# Altium PCB golgi_bot.PcbDoc
Units mm, origin at the board's own origin, x right, y up, seen from the top; angles counter-clockwise.
Board outline 67.56 x 95 mm, 2 copper layers (Top Layer, Bottom Layer); 22 components, 25 nets, 102 pads, 6 vias.
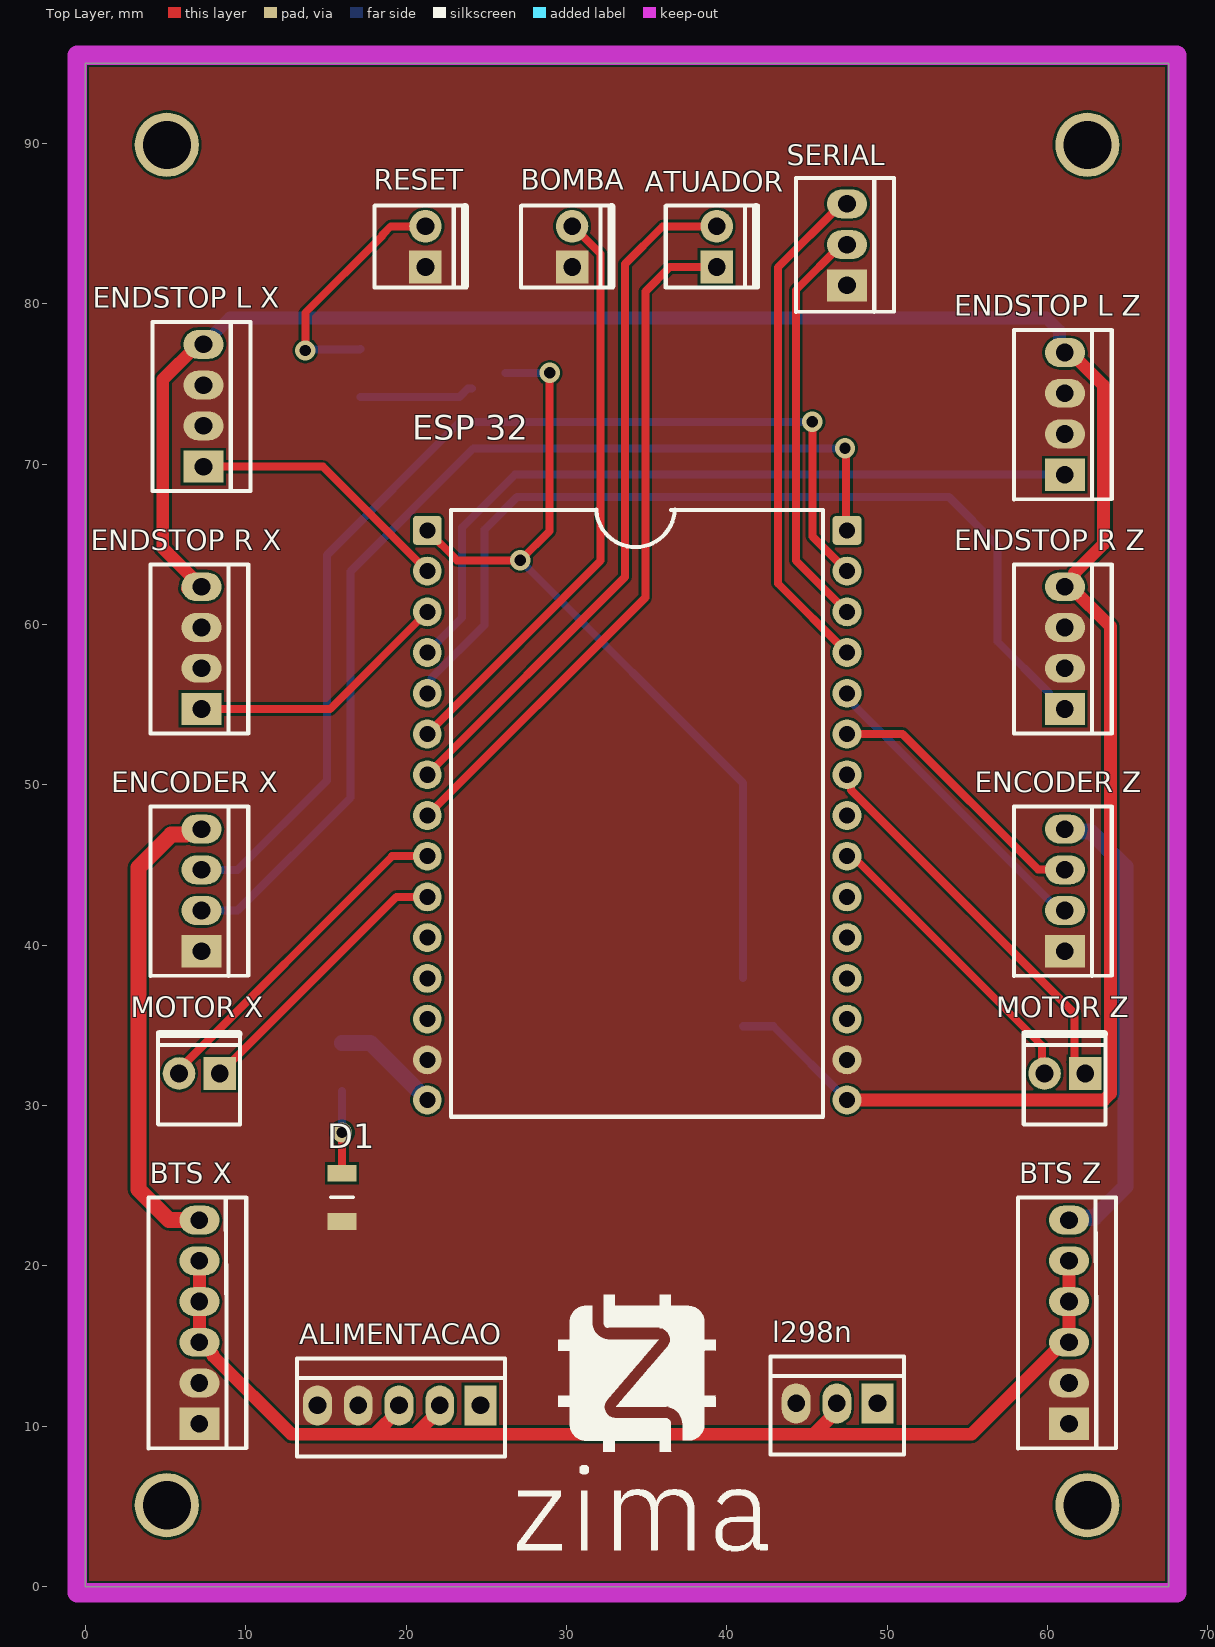
[diagram p0: Top Layer view]
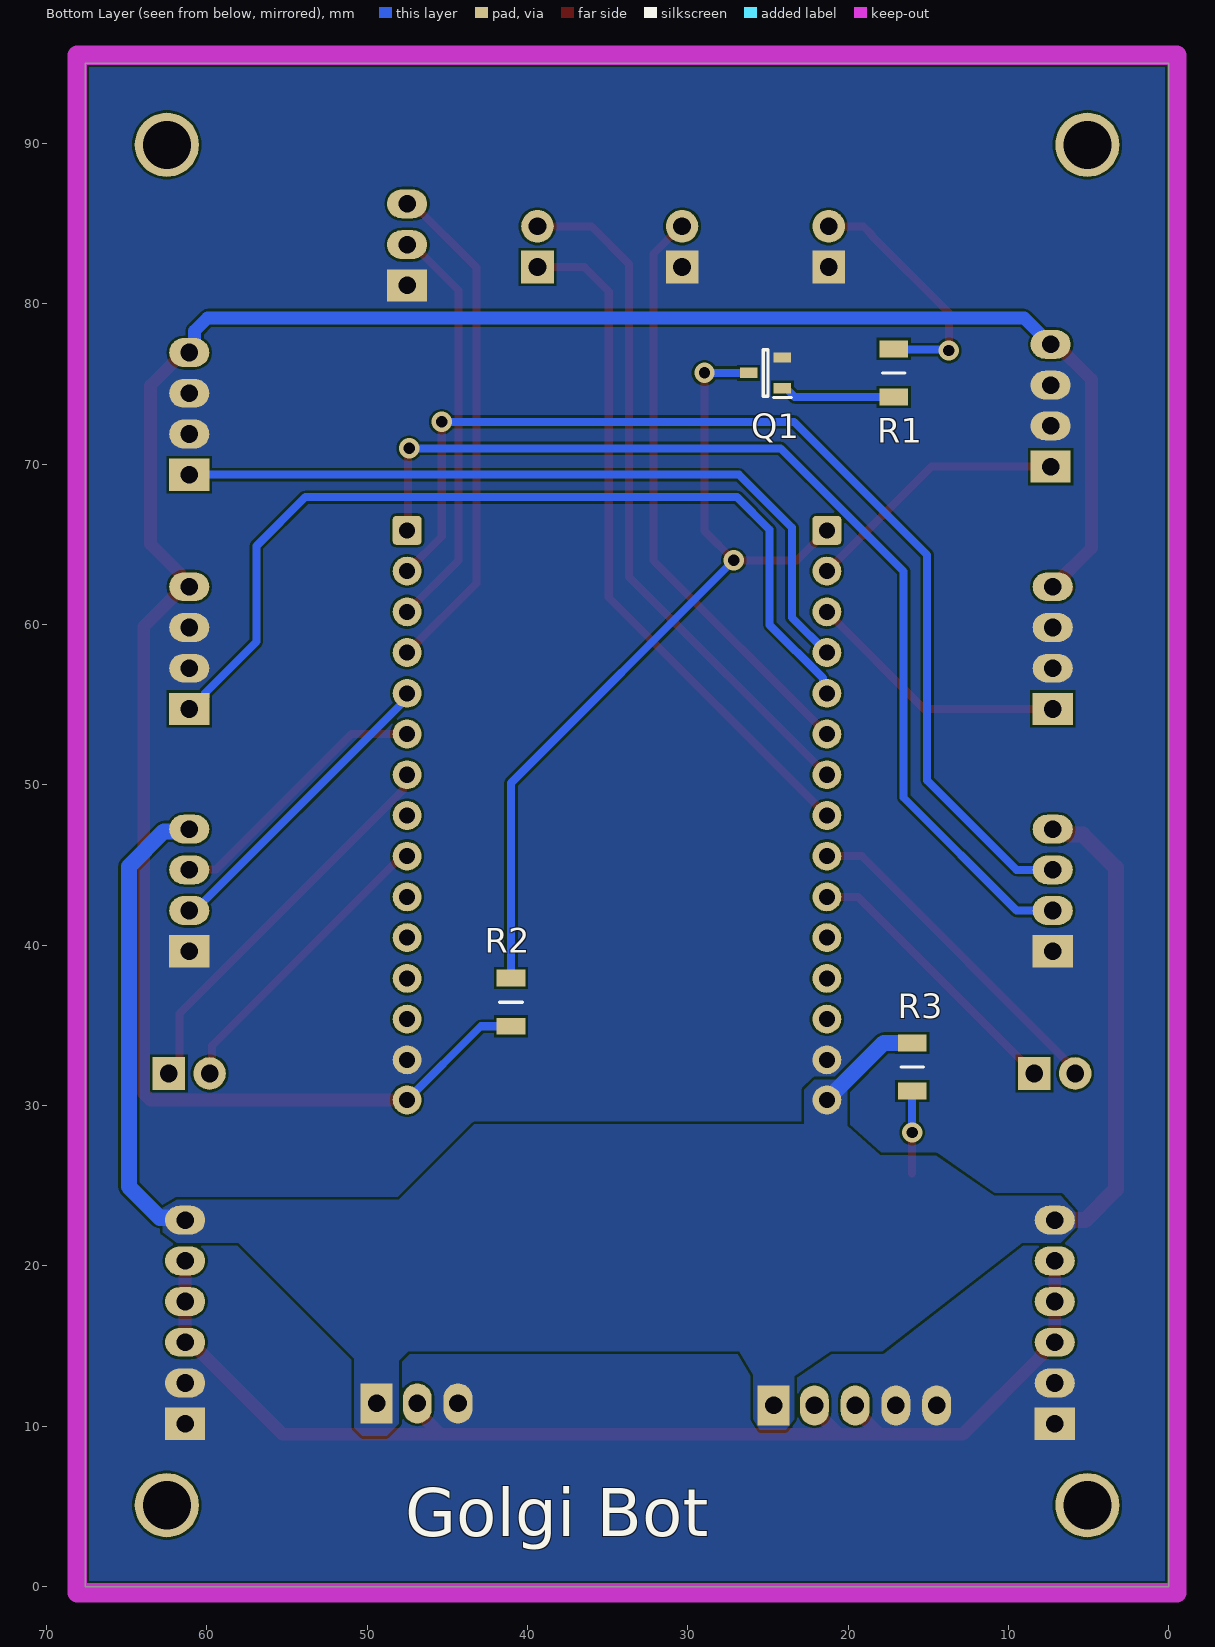
[diagram p1: Bottom Layer view, seen from below]

## Layer stack, top to bottom
Top Solder: solder mask 0.0102, Solder Resist, Dk 3.5
Top Layer: signal copper 0.0356
Dielectric 1: dielectric 0.32, FR-4, Dk 4.8
Bottom Layer: signal copper 0.0356
Bottom Solder: solder mask 0.0102, Solder Resist, Dk 3.5

## Board outline
0,0 67.564,0 67.564,94.996 0,94.996

## Design rules (kind name [scope] priority, off if disabled: settings)
Clearance [All] p1: gap=0.152 ignorepadtopadclearanceinfootprint=FALSE except(0: Arc-Hole Track-Hole SMDPad-Hole THPad-Hole Via-Hole Fill-Hole Poly-Hole Region-Hole Text-Hole)
ComponentClearance [All] p1: gap=0.1 collisioncheckmode=3 verticalgap=0.1 showdistances=FALSE
HoleSize [All] p1: absolutevalues=TRUE maxlimit=3.048 minlimit=0.025 maxpercent=80.000 minpercent=20.000
MinimumSolderMaskSliver [All] p1: minsoldermaskwidth=0.1
PolygonConnect [All] p1: connectstyle=Direct reliefconductorwidth=0.254 reliefentries=4 polygonreliefangle="90 Angle" airgapwidth=0.254
RoutingVias [All] p1: holewidth=0.4 width=0.8 viastyle="Through Hole" minholewidth=0.3 minwidth=0.6 maxholewidth=0.5 maxwidth=1
SilkToSilkClearance [All] p1: silktosilkclearance=0
SilkToSolderMaskClearance [IsPad] p1: minsilkscreentomaskgap=0 clearancetoexposedcopper=TRUE
SolderMaskExpansion [All] p1: expansion=0.08 istentingtop=FALSE
Width [All] p1: maxlimit=2.032 minlimit=0.3 preferedwidth=0.5 minimp=50.000000 maximp=50.000000 favimp=50.000000
25 further rules are at their usual default settings.

## Components (designator, comment, footprint, x,y, rotation, side; value= is the part's Value field where it differs from the comment)
ALIMENTACAO "KK_2.54_5vias" KK_5vias_180° 24.638,11.303 r180 top
ATUADOR "KK_2.54_2vias" KK_2VIAS_180º 39.37,82.296 r90 top
BOMBA "KK_2.54_2vias" KK_2VIAS_180º 30.353,82.296 r90 top
"BTS X" "KK_2.54_6vias" KK_6vias_180° 7.112,10.16 r90 top
"BTS Z" "KK_2.54_6vias" KK_6vias_180° 61.341,10.16 r90 top
D1 "LED 3MM RED" "LED RED" 16.002,24.281 r270 top
"ENCODER X" "KK_2.54_4vias" KK_4vias_180° 7.239,39.624 r90 top
"ENCODER Z" "KK_2.54_4vias" KK_4vias_180° 61.087,39.624 r90 top
"ENDSTOP L X" "KK_2.54_4vias" KK_4vias_180° 7.366,69.85 r90 top
"ENDSTOP L Z" "KK_2.54_4vias" KK_4vias_180° 61.087,69.342 r90 top
"ENDSTOP R X" "KK_2.54_4vias" KK_4vias_180° 7.239,54.737 r90 top
"ENDSTOP R Z" "KK_2.54_4vias" KK_4vias_180° 61.087,54.737 r90 top
"ESP 32" "microcontrolador" ESP32_Desvikit_v1 21.323,65.873 r0 top value="ESP32 Desvikit V1"
l298n "KK_2.54_3vias" KK_3vias_180º 49.403,11.43 r180 top
"MOTOR X" "KK_2.54_2vias" KK_2VIAS_180º 8.382,32.004 r180 top
"MOTOR Z" "KK_2.54_2vias" KK_2VIAS_180º 62.357,32.004 r180 top
Q1 "Trans BC817" SOT96P240X110-3N 25.146,75.692 r0 bottom
R1 "2k2" RESC3216X60N 17.152,75.692 r90 bottom
R2 "2k2" RESC3216X60N 41.021,36.449 r270 bottom
R3 "680R" RESC3216X60N 16.002,32.409 r270 bottom
RESET "KK_2.54_2vias" KK_2VIAS_180º 21.209,82.296 r90 top
SERIAL "KK_2.54_3vias" KK_3vias_180º 47.498,81.153 r90 top

## Footprints (in the part's own frame and the unit in brackets; to place one, negate y for a bottom-side part, rotate by r counter-clockwise, add the part's x,y. Pads: shape width x height; smd on the part's side, far side on the other; paste and mask are expansions set on the pad)
ESP32_Desvikit_v1 [mm]
  rrect25% 1.8x1.8 hole 1: 1(0,0) 30(26.175,0)
  round 1.8 hole 1: 2(0,-2.54) 3(0,-5.08) 4(0,-7.62) 5(0,-10.16) 6(0,-12.7) 7(0,-15.24) 8(0,-17.78) 9(0,-20.32) 10(0,-22.86) 11(0,-25.4) 12(0,-27.94) 13(0,-30.48) 14(0,-33.02) 15(0,-35.52) 16(26.175,-35.52) 17(26.175,-33.02) 18(26.175,-30.48) 19(26.175,-27.94) 20(26.175,-25.4) 21(26.175,-22.86) 22(26.175,-20.32) 23(26.175,-17.78) 24(26.175,-15.24) 25(26.175,-12.7) 26(26.175,-10.16) 27(26.175,-7.62) 28(26.175,-5.08) 29(26.175,-2.54)
  silkscreen extent 1.47,-36.57 24.69,1.31, body extent -1.2,-46.03 27.4,4.9, height 15.1
KK_2VIAS_180º [mil]
  rect 80x80 hole 43.31: 1(0,0)
  round 80 hole 43.31: 2(100,0)
  silkscreen extent -50,-101 151,125, body extent -61,-108 165,128, height 468
KK_3vias_180º [mm]
  rect 2x2.5 hole 1.1: 1(0,0)
  oval 1.8x2.5 hole 1.1: 2(2.54,0) 3(5.08,0)
  silkscreen extent -1.65,-2.92 6.69,3.18, body extent -1.6,-2.95 6.69,3.05, height 11.9
KK_4vias_180° [mm]
  rect 2x2.5 hole 1.1: 1(0,0)
  oval 1.8x2.5 hole 1.1: 2(2.54,0) 3(5.08,0) 4(7.62,0)
  silkscreen extent -1.53,-2.92 9.02,3.18, body extent -1.4,-2.79 8.76,3.01, height 11.72
KK_5vias_180° [mm]
  rect 2x2.5 hole 1.1: 1(0,0)
  oval 1.8x2.5 hole 1.1: 2(2.54,0) 3(5.08,0) 4(7.62,0) 5(10.16,0)
  silkscreen extent -1.53,-2.92 11.43,3.18, body extent -1.4,-2.79 11.3,3.01, height 11.72
KK_6vias_180° [mm]
  rect 2x2.5 hole 1.1: 1(0,0)
  oval 1.8x2.5 hole 1.1: 2(2.54,0) 3(5.08,0) 4(7.62,0) 5(10.16,0) 6(12.7,0)
  silkscreen extent -1.53,-2.92 14.11,3.18, body extent -1.4,-2.79 13.84,3.05, height 11.7
"LED RED" [mm]
  rect 1.05x1.8 smd: 1(-1.5,0) 2(1.5,0)
  silkscreen extent 0,-0.7 0,0.7, body extent -0.79,-0.43 0.81,0.37, height 0.75
RESC3216X60N [mm]
  rect 1.05x1.8 smd: 1(-1.5,0) 2(1.5,0)
  silkscreen extent 0,-0.7 0,0.7, body extent -1.57,-0.8 1.58,0.8, height 0.6
SOT96P240X110-3N [mm]
  rect 1.1x0.65 smd: 1(-1.05,0.96) 2(-1.05,-0.96) 3(1.05,0)
  silkscreen extent -1.6,-1.45 0.15,1.54, body extent -1.2,-1.45 1.2,1.45, height 1.1

## Part data
ALIMENTACAO: "Conector KK 2.54mm 5 vias", Descrição="Conector KK 3 vias com passo 2.54mm", Encapsulamento="PTH - 180º", Modelo="3 vias - 180º", Valor="KK 5 vias 180º"
ATUADOR BOMBA "MOTOR X" "MOTOR Z" RESET: "Conector KK 2.54mm 2 vias", Descrição="Conector KK 3 vias com passo 2.54mm", Encapsulamento="PTH - 180º", Modelo="2 vias - 180º", Valor="KK 2 vias 180º"
"BTS X" "BTS Z": "Conector KK 2.54mm 6 vias", Descrição="Conector KK 3 vias com passo 2.54mm", Encapsulamento="PTH - 180º", Modelo="3 vias - 180º", Valor="KK 6 vias 180º"
D1: Current If Luminous Intensity=2, Forward Current If=20, Forward Voltage VF Max=2.5, LED Colour=Red, Manufacturer=Paralight, Manufacturer Part Number=IMP585, Operating Temperature Max=85, Operating Temperature Min=-40, Operating Temperature Range="-40°C to +85", Peak Forward Current=7, Supplier Part Number 1="Led 3mm Vermelho Difuso L-314HD - Paralight", Voltage Vf Typ="2.2V<!--FANDB--><div class=\"features-and-benefits-container\"><div class=\"features-and-benefits-description\"><span class=\"features-benefits-value\">The L-934LID from Kingbright is a through hole round shape high efficiency red colour LED. The device is made of gallium arsenide phosphide on gallium phosphide orange light emitting diode. This LED is widely used because of low power consumption, long life and solid state reliability.</span></div><div class=\"features-and-benefits-list\"><ul class=\"features-and-benefits-list-list\"><li class=\"features-and-benefits-list-item\">Standard bulb size of T-1 (3mm)</li><li class=\"features-and-benefits-list-item\">Reliable and rugged</li><li class=\"features-and-benefits-list-item\">Viewing angle is 60°</li><li class=\"features-and-benefits-list-item\">Luminous intensity of 3mcd at 2mA</li><li class=\"features-and-benefits-list-item\">Forward voltage is 2.0V</li><li class=\"features-and-benefits-list-item\">Forward current (If) is 20mA</li><li class=\"features-and-benefits-list-item\">Dominant wavelength is 625nm at IF=20mA</li><li class=\"features-and-benefits-list-item\">Peak wavelength is 627nm at IF=20", Bulb Size=3mm, ComponentLink1Description=http://loja.multcomercial.com.br/led-3mm-vermelho-difuso-l-314hd-paralight.html, ComponentLink1URL=http://loja.multcomercial.com.br/led-3mm-vermelho-difuso-l-314hd-paralight.html, Dominant Wavelength=625, External Diameter=2.9, External Length / Height=4.6, Forward Current If Max=20, Forward Voltage=2, Lead Cross-section Depth=0.5, Lead Cross-section Width=0.5, Lead Spacing=2.54, LED / Lamp Size="3mm / T-1", LED Mounting="Through Hole", LED Type=Standard, Lens Shape=Round, Luminous Intensity=3, Luminous Intensity @ If Min=0.7, Luminous Intensity Typ=3, Mounting Type="PCB Through Hole", MSL=-, No. of Pins=2, Packaging=Each, Peak Wavelength=625, PIV Max=5, Pricing 1="1=0.15 (BRL)", RoHS=YES, Stock 1=35260, Supplier 1="Mult Comercial", SVHC="No SVHC (15-Jun-2015)", Viewing Angle=60°, Wavelength Typ=625
"ENCODER X" "ENCODER Z" "ENDSTOP L X" "ENDSTOP L Z" "ENDSTOP R X" "ENDSTOP R Z": "Conector KK 2.54mm 4 vias", Descrição="Conector KK 3 vias com passo 2.54mm", Encapsulamento="PTH - 180º", Modelo="3 vias - 180º", Valor="KK 4 vias 180º"
"ESP 32": library part "ESP32 Desvikit v1", "microcontrolador com moculo bluethoth e wifi"
l298n SERIAL: "Conector KK 2.54mm 3 vias", Descrição="Conector KK 3 vias com passo 2.54mm", Encapsulamento="PTH - 180º", Modelo="3 vias - 180º", Valor="KK 3 vias 180º"
Q1: "Transistor BJT NPN BC817-25-7-F", Arrow Part Number=BC817-25-7-F, Manufacturer_Name="Diodes Inc.", Mouser Part Number=621-BC817-25-7-F, Arrow Price/Stock=https://www.arrow.com/en/products/bc817-25-7-f/diodes-incorporated, Datasheet Link=https://www.diodes.com/assets/Datasheets/ds11107.pdf, Height=1.1mm, Manufacturer_Part_Number=BC817-25-7-F, Mouser Price/Stock=https://www.mouser.co.uk/ProductDetail/Diodes-Incorporated/BC817-25-7-F?qs=rGAXPo9uwV0jK0EyLZnqOw%3D%3D
R1 R2 R3: library part "Resistor 1206", "Resistor", Arrow Part Number=CRCW12064K70FKEA, Manufacturer_Name=Vishay, Mouser Part Number=71-CRCW1206-4.7K-E3, Arrow Price/Stock=https://www.arrow.com/en/products/crcw12064k70fkea/vishay, Datasheet Link=http://docs-emea.rs-online.com/webdocs/13ec/0900766b813ecc08.pdf, Height=0.6mm, Manufacturer_Part_Number=CRCW12064K70FKEA, Mouser Price/Stock=https://www.mouser.co.uk/ProductDetail/Vishay-Dale/CRCW12064K70FKEA?qs=1vm4qhDHCvlKJmatsKzyFQ%3D%3D

## Free pads (board coordinates)
  round 4 hole 3: 1(5.08,5.08) 2(62.484,5.08) 3(62.484,89.916) 4(5.08,89.916)

## Via types
v1: diameter 1.27, hole 0.711, Top Layer to Bottom Layer, 6 vias

## Nets (pads, with @x,y where several pads share a name; then routed paths per layer and width w, separated by ;. In a path a pad name is that pad's centre, name@x,y a point inside that pad or via, vN(x,y) a via of type N, cw(c..) or ccw(c..) an arc to the next point about the centre after c; other vN are vias at no path point)
+3V3: "ENDSTOP L X.4" "ENDSTOP L Z.4" "ENDSTOP R X.4" "ENDSTOP R Z.4" "ESP 32.16" R2.2 | length 149
  Top Layer w0.8: 6.35,62.242 7.124,62.242 7.239,62.357 4.826,64.77 4.826,75.28 7.016,77.47 7.366,77.47 ; 47.498,30.353 63.519,30.353 63.925,30.759 63.925,59.869 61.437,62.357 61.087,62.357 61.686,62.956 61.686,63.214 63.5,65.029 63.5,74.899 61.437,76.962 61.087,76.962
  Bottom Layer w0.5: R2.2 42.902,34.949 47.498,30.353
  Bottom Layer w0.8: 7.366,77.47 9.017,79.121 59.944,79.121 60.753,78.312 60.753,77.296 61.087,76.962
+5: "BTS X.3" "BTS X.4" "BTS X.5" "BTS Z.3" "BTS Z.4" "BTS Z.5" ALIMENTACAO.2 ALIMENTACAO.3 l298n.2 | length 75.5
  Top Layer w0.8: 7.112,20.32 7.112,17.78 7.112,15.24 7.191,15.24 ; 7.962,14.469 7.962,14.39 12.851,9.501 18.04,9.501 ; ALIMENTACAO.3 19.558,11.019 18.04,9.501 ; ALIMENTACAO.2 22.098,11.019 20.58,9.501 ; l298n.2@47.235,11.312 45.425,9.501 ; 61.341,20.32 61.341,17.78 61.341,15.24 60.991,15.24 55.252,9.501 45.425,9.501 ; 18.04,9.501 20.58,9.501 ; 20.58,9.501 45.425,9.501
+12: "BTS X.6" "BTS Z.6" "ENCODER X.4" "ENCODER Z.4" "ESP 32.15" ALIMENTACAO.1 l298n.1 R3.1 | length 65.5
  Top Layer w1: 7.112,22.86 5.224,22.86 3.302,24.782 3.302,44.845 5.351,46.894 6.268,46.894 6.618,47.244 7.239,47.244
  Bottom Layer w1: R3.1 17.767,33.909 21.323,30.353 ; 61.087,47.244 61.233,47.098 62.661,47.098 64.852,44.906 64.852,24.944 62.915,23.006 61.487,23.006 61.341,22.86
atuador_l: "ESP 32.8" ATUADOR.1 | length 43.4
  Top Layer w0.5: 21.323,48.093 34.925,61.695 34.925,80.772 36.449,82.296 ATUADOR.1
atuador_r: "ESP 32.7" ATUADOR.2 | length 43.7
  Top Layer w0.5: 21.323,50.633 33.655,62.965 33.655,82.489 36.002,84.836 ATUADOR.2
bomba: "ESP 32.6" BOMBA.2 | length 36.9
  Top Layer w0.5: 21.323,53.173 32.131,63.981 32.131,83.119 30.414,84.836 BOMBA.2
en: "ESP 32.1" Q1.3 R2.1 | length 53.6
  Top Layer w0.5: 21.323,65.873 23.188,64.008 v1(27.125,64.008) 28.956,65.839 v1(28.956,75.692)
  Bottom Layer w0.5: Q1.3 v1(28.956,75.692) ; v1(27.125,64.008) 41.021,50.112 R2.1
encoder_a_x: "ENCODER X.3" "ESP 32.29" | length 68.1
  Top Layer w0.5: v1(45.339,72.644) 45.339,65.492 47.498,63.333
  Bottom Layer w0.5: 7.239,44.704 7.589,44.704 9.494,44.704 15.066,50.276 15.066,64.342 23.368,72.644 v1(45.339,72.644)
encoder_a_z: "ENCODER Z.3" "ESP 32.25" | length 17.1
  Top Layer w0.5: 47.498,53.173 50.967,53.173 59.42,44.72 61.071,44.72 61.087,44.704
encoder_b_x: "ENCODER X.2" "ESP 32.30" | length 65.5
  Top Layer w0.5: v1(47.371,70.993) 47.434,70.929 47.434,65.937 47.498,65.873
  Bottom Layer w0.5: 7.239,42.164 7.589,42.164 9.494,42.164 16.53,49.2 16.53,63.317 24.206,70.993 v1(47.371,70.993)
encoder_b_z: "ENCODER Z.2" "ESP 32.26" | length 20.1
  Top Layer w0.5: 47.498,55.713 47.66,55.713 ; 60.574,42.164 61.087,42.164
  Bottom Layer w0.5: 47.498,55.713 47.498,55.403 60.737,42.164 61.087,42.164
endstop_l_x: "ENDSTOP L X.1" "ESP 32.2" | length 16.7
  Top Layer w0.5: 7.366,69.85 14.806,69.85 21.323,63.333
endstop_l_z: "ENDSTOP L Z.1" "ESP 32.4" | length 47.6
  Bottom Layer w0.5: 21.323,58.253 23.495,60.425 23.495,66.04 26.797,69.342 61.087,69.342
endstop_r_x: "ENDSTOP R X.1" "ESP 32.3" | length 16.6
  Top Layer w0.5: 7.239,54.737 15.267,54.737 21.323,60.793
endstop_r_z: "ENDSTOP R Z.1" "ESP 32.5" | length 57.8
  Bottom Layer w0.5: 21.323,55.713 21.572,55.962 21.572,56.66 24.892,59.981 24.892,65.913 26.924,67.945 53.848,67.945 56.896,64.897 56.896,58.928 60.087,55.737 60.087,55.487 60.837,54.737 61.087,54.737
GND: "BTS X.1" "BTS X.2" "BTS Z.1" "BTS Z.2" "ENCODER X.1" "ENCODER Z.1" "ENDSTOP L X.2" "ENDSTOP L X.3" "ENDSTOP L Z.2" "ENDSTOP L Z.3" "ENDSTOP R X.2" "ENDSTOP R X.3" "ENDSTOP R Z.2" "ENDSTOP R Z.3" "ESP 32.14" "ESP 32.17" ALIMENTACAO.4 ALIMENTACAO.5 BOMBA.1 D1.2 l298n.3 Q1.2 RESET.1 SERIAL.1
motor_l_x: "ESP 32.10" "MOTOR X.1" | length 17.5
  Top Layer w0.5: 8.382,32.004 19.391,43.013 21.323,43.013
motor_l_z: "ESP 32.24" "MOTOR Z.1" | length 24.9
  Top Layer w0.5: 47.498,50.633 47.747,50.384 47.747,49.686 61.691,35.741 61.691,32.67 62.357,32.004
  Top Layer w0.7: 61.691,32.67 61.691,32.769
motor_r_x: "ESP 32.9" "MOTOR X.2" | length 21.2
  Top Layer w0.5: 5.842,32.004 5.842,32.258 19.137,45.553 21.323,45.553
motor_r_z: "ESP 32.22" "MOTOR Z.2" | length 18.9
  Top Layer w0.5: 47.498,45.553 47.85,45.553 59.669,33.734 59.669,32.152 59.817,32.004
NetD1_1: D1.1 R3.2 | length 5.1
  Top Layer w0.5: D1.1 v1(16.002,28.321)
  Bottom Layer w0.5: v1(16.002,28.321) R3.2
NetQ1_1: Q1.1 R1.1 | length 7.2
  Bottom Layer w0.5: R1.1 23.331,74.192 23.871,74.732 Q1.1
NetR1_2: R1.2 RESET.2 | length 15.6
  Top Layer w0.5: v1(13.716,77.089) 13.716,79.441 18.542,84.267 18.542,84.328 19.05,84.836 RESET.2
  Bottom Layer w0.5: v1(13.716,77.089) 13.767,77.14 17.1,77.14 R1.2
RX: "ESP 32.27" SERIAL.3 | length 31.8
  Top Layer w0.5: 47.498,58.253 43.18,62.571 43.18,82.265 47.148,86.233 SERIAL.3
TX: "ESP 32.28" SERIAL.2 | length 25.8
  Top Layer w0.5: 47.498,60.793 44.302,63.989 44.302,80.847 47.148,83.693 SERIAL.2
pads on no net: "ESP 32.11" "ESP 32.12" "ESP 32.13" "ESP 32.18" "ESP 32.19" "ESP 32.20" "ESP 32.21" "ESP 32.23"

## Polygon pours and split planes (outlines as drawn)
GND on Top Layer "GND_L01_P012" (solid, pour order 12): 0,94.996 67.564,94.996 67.564,0 0,0
+12 on Bottom Layer "+12_L02_P007" (solid, pour order 7): 9.144,21.463 6.731,21.463 5.842,22.352 5.842,23.368 6.731,24.384 10.891,24.384 14.498,26.888 18.034,26.924 20.066,28.744 20.066,30.988 20.701,31.623 22.098,31.623 22.733,30.988 22.733,28.829 43.307,28.829 48.006,24.13 61.849,24.13 62.738,23.622 62.738,22.098 61.849,21.463 58.039,21.463 50.8,14.224 50.8,9.906 50.292,9.398 48.768,9.398 48.006,10.16 48.006,14.087 47.413,14.679 26.797,14.679 25.908,13.208 25.908,10.442 25.496,9.779 23.876,9.779 23.368,10.442 23.368,13.127 21.082,14.679 17.854,14.679
GND on Bottom Layer "GND_L02_P013" (solid, pour order 13): 0,94.996 67.564,94.996 67.564,0 0,0

## Keep-outs
Keep-Out Layer:
  lines w1.2: -0.508,-0.381 -0.508,95.504 68.072,95.504 68.072,-0.381 -0.508,-0.381

## Silkscreen, mask and mechanical layers (free items; w line width, h text height)
Top Overlay:
  drawing of 7 lines, arcs and shapes, not listed
Bottom Overlay:
  text "Golgi Bot" at 47.625,3.159 h3